# EAGLE board aquam60 (EAGLE 9.6.2), part 1 of 2
DOCO_NUMBER: 4014 003; REV: 03
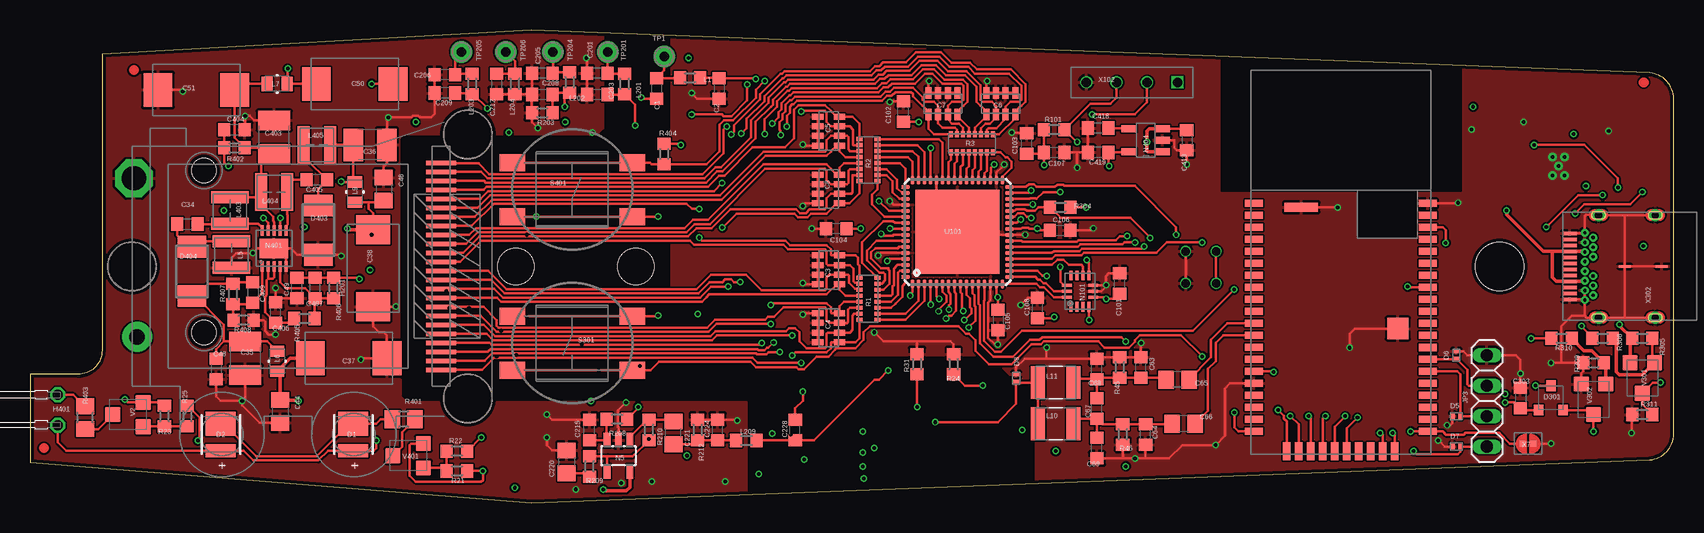
[diagram p0: board, top side]
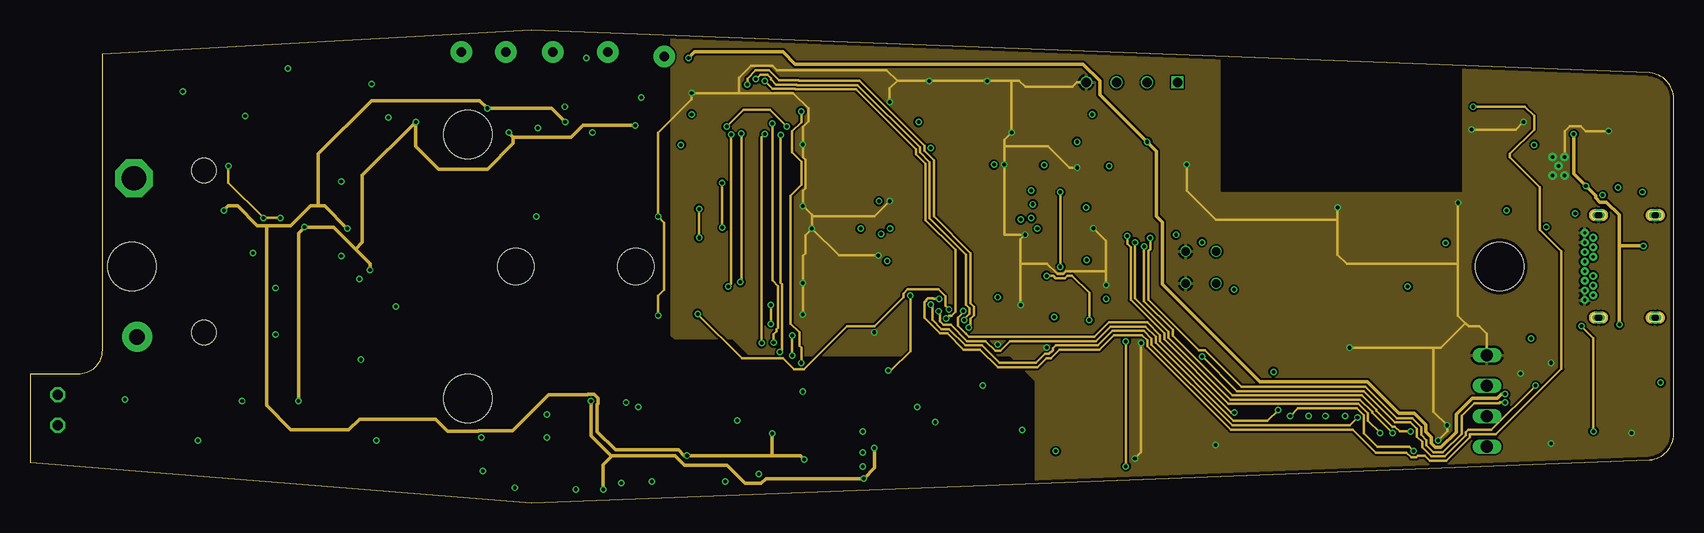
[diagram p1: board, inner layer L2_VCC]
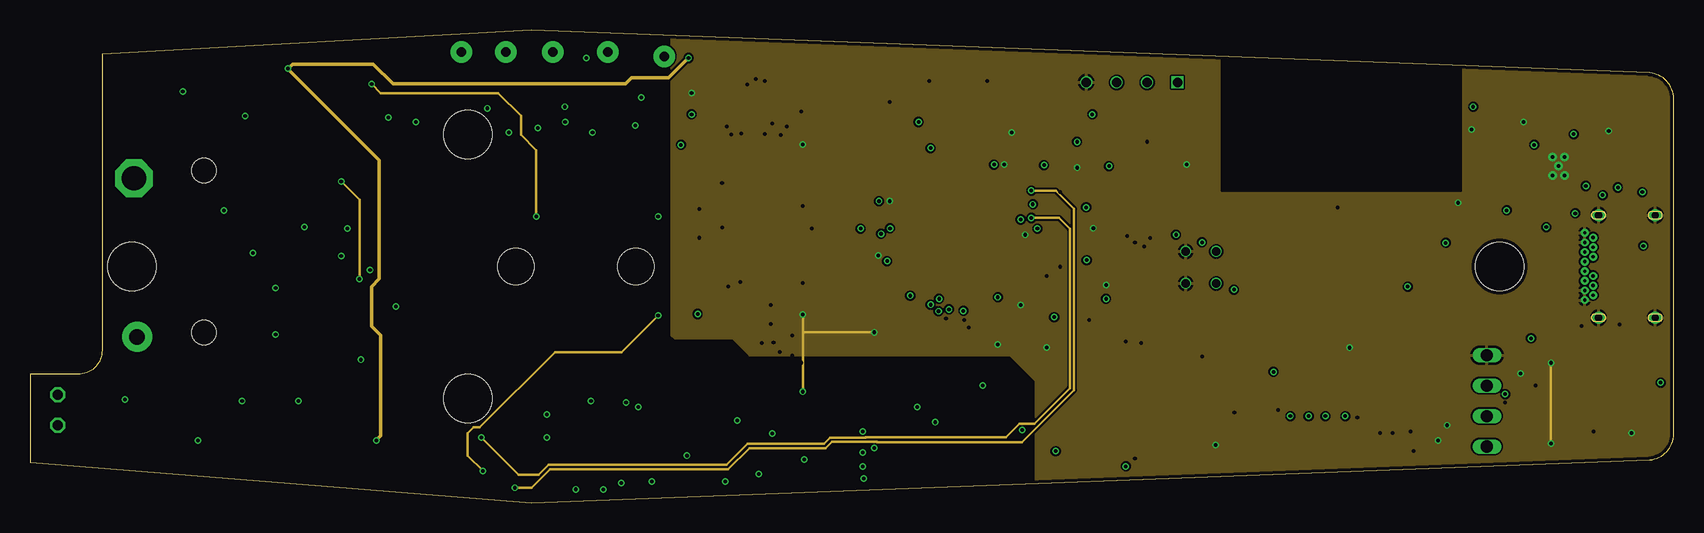
[diagram p2: board, inner layer L3_GND]
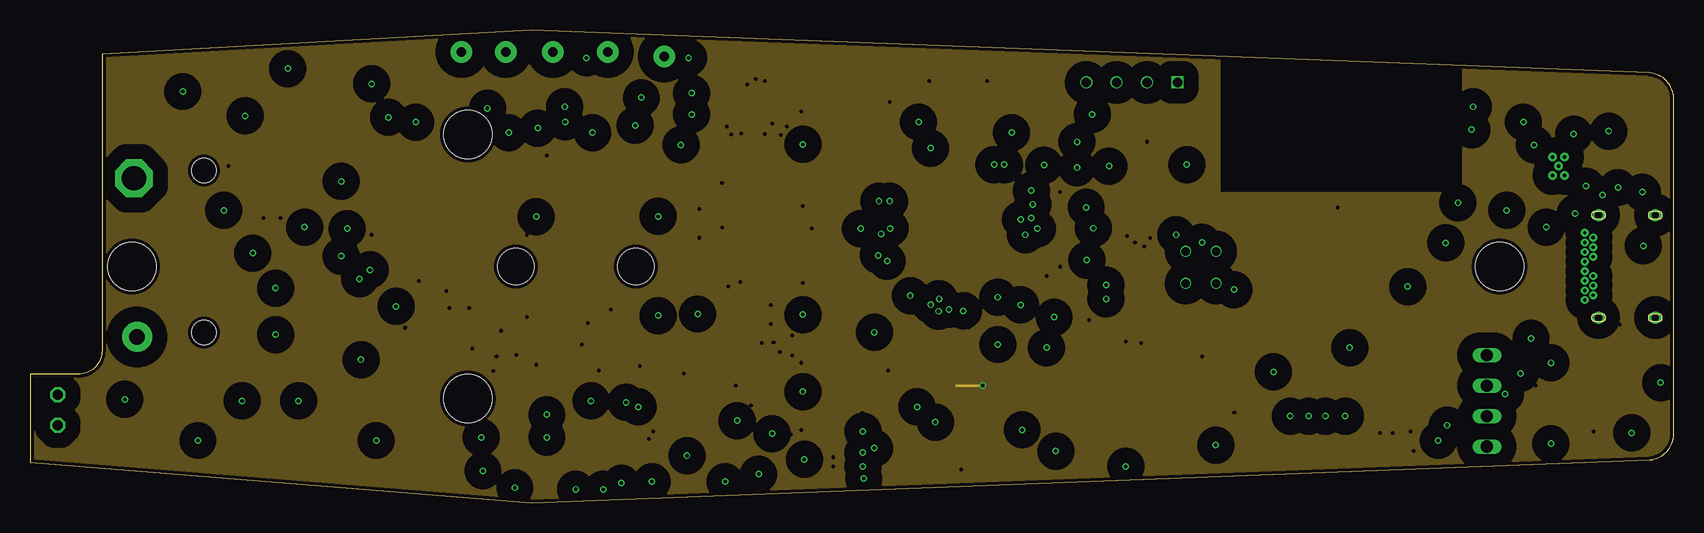
[diagram p3: board, inner layer L4_PE]
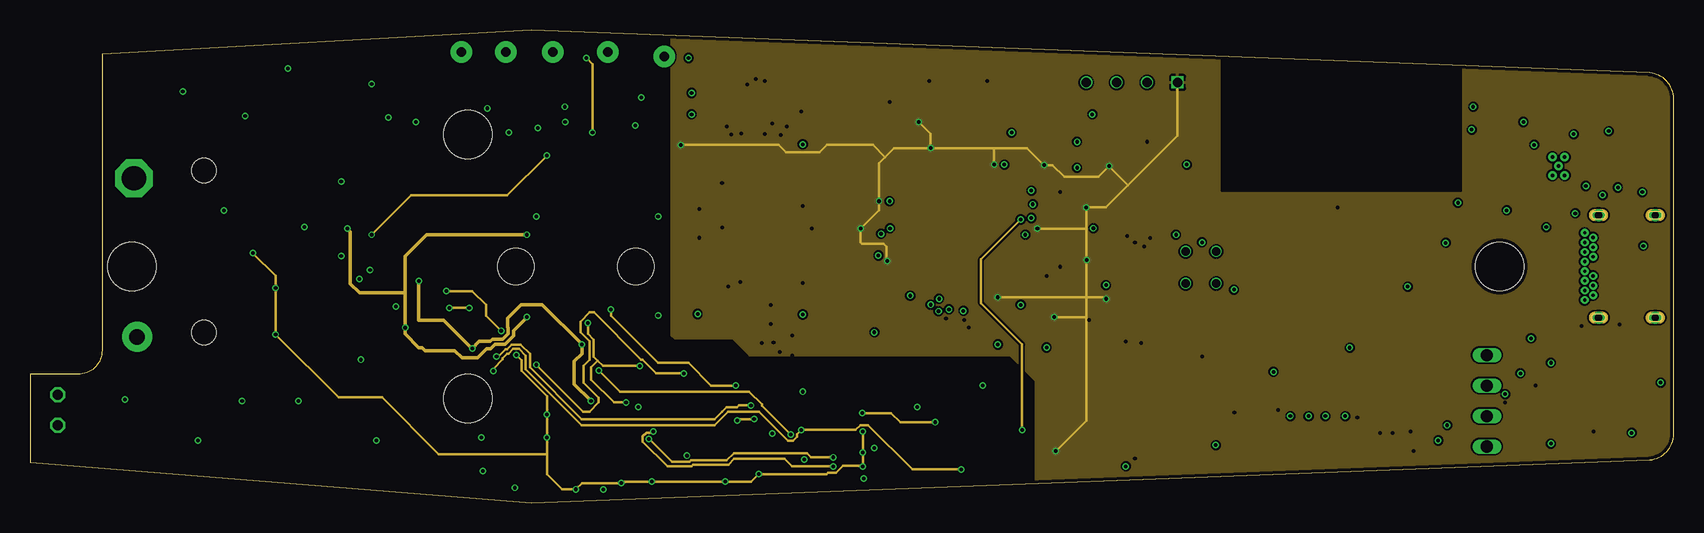
[diagram p4: board, inner layer L5_AGND]
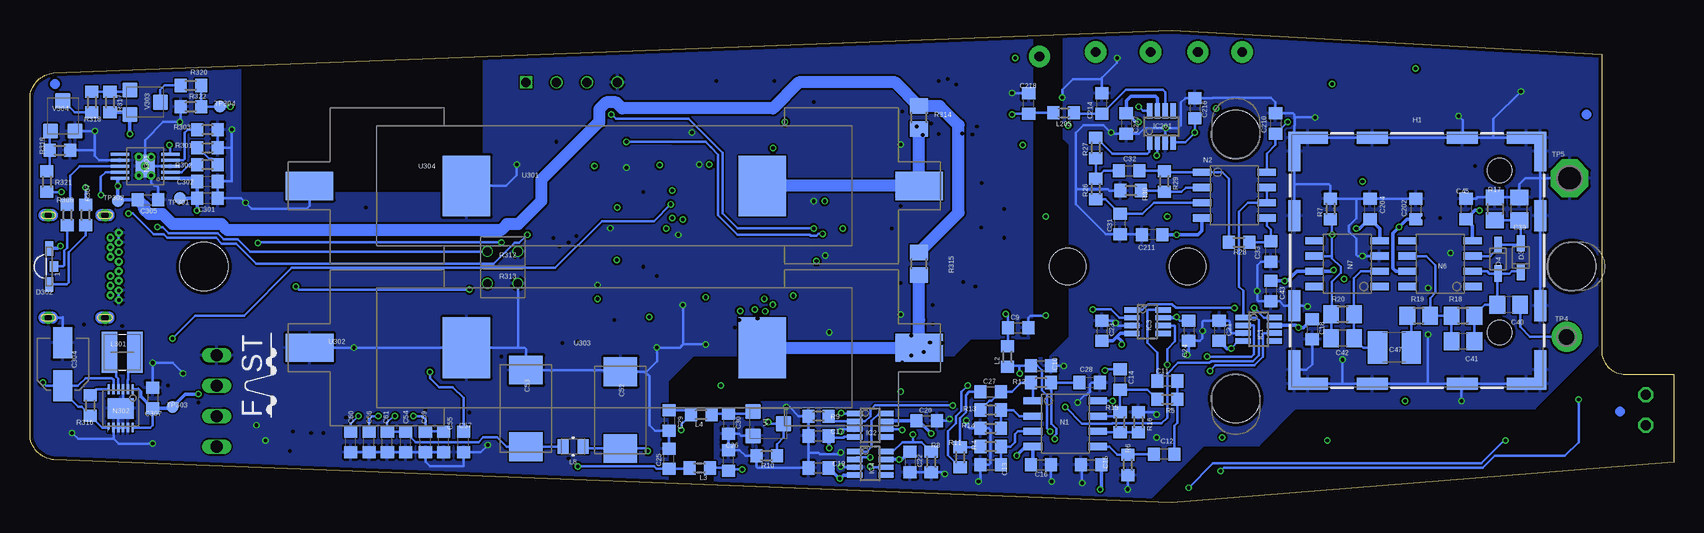
[diagram p5: board, bottom side, seen from below]

Size 137.01 x 39.4 mm. Coordinates in mm from the lower left corner, seen from the top.
Outline: 4.01,10.7 0.01,10.7 0,3.4 41.8,0 135.01,3.58 arc78 137.01,5.52 137.01,33.88 arc78 135.01,35.82 41.8,39.4 6.01,37.38 6.01,12.7 arc-90 4.01,10.7
Copper layers ((1+2)*3+14*(15+16)): Top 0.035mm / dielectric 0.14mm / L2_VCC 0.035mm / dielectric 0.23mm / L3_GND 0.035mm / dielectric 0.14mm / L4_PE 0.035mm / dielectric 0.23mm / L5_AGND 0.035mm / dielectric 0.14mm / Bottom 0.035mm
Design rules "PCB-POOL Standard_ML8_0.20mm_0.10mm_Blind_Via_Blind_VIA": minimum track width 0.15mm, minimum drill 0.2mm, track to track 0.15mm, track to pad 0.15mm, pad to pad 0.15mm, via to via 0.15mm, smd to smd 0.15mm, copper to edge 0.3mm, drill to drill 0.2mm, minimum pad ring 0.1mm, minimum via ring 0.1mm, stop-mask expansion 0.075mm, vias tented up to drill 12mil, thermal gap 0.2mm
Net classes: 1 V+: width 0.305 mm; 3 VCC: width 0.203 mm; 4 AGND: clearance 1.016 mm to class 2, clearance 1.016 mm to class 3; 5 PE: clearance 1.27 mm to class 0, clearance 1.27 mm to class 1, clearance 1.27 mm to class 2, clearance 1.27 mm to class 3, clearance 1.27 mm to class 4, clearance 1.27 mm
Holes 3 mm at 40.5,19.7 50.5,19.7
Holes 4 mm at 122.5,19.7
tKeepout: area 37.5,16.7 to 43.5,22.7; area 47.5,16.7 to 53.5,22.7; area 119.5,16.7 to 125.5,22.7
bKeepout: area 37.5,16.7 to 43.5,22.7; area 47.5,16.7 to 53.5,22.7; area 119.5,16.7 to 125.5,22.7; area 37.5,16.7 to 43.5,22.7; area 47.5,16.7 to 53.5,22.7
tRestrict: area 99.3,26 to 119.3,37.8

## Footprints (pad centres in the part's own frame; a part is rotated, then mirrored left to right if it is on the bottom)
C0603 = smd 1 x 1.1: 1 -0.85,0; 2 0.85,0
C0612 = smd 0.5 x 0.95: 1 -1.2,0.9; 2 -1.2,-0.9; 3 -0.4,0.9; 4 -0.4,-0.9; 5 0.4,0.9; 6 0.4,-0.9; 7 1.2,0.9; 8 1.2,-0.9
C1210 = smd 1.6 x 2.7: 1 -1.4,0; 2 1.4,0
WE_WCAP-PHGP = smd 2.4 x 2.8: 1- -3.2,0; 2+ 3.2,0
C0805 = smd 1.3 x 1.5: 1 -0.95,0; 2 0.95,0
2.6X1.6X1(BXCXA) = smd 2.6 x 1.6: 1 1.8,0; 2 -1.8,0
WL-SWTP_3030 = smd 2 x 2.5: 1 -0.9,0 | smd 1.1 x 2.5: 2 1.35,0
SOD-323 = smd 1.35 x 0.65: A 1.2,0; K -1.2,0
DIODFN100X60X60-2 = smd 0.36 x 0.6: 1 -0.32,0; 2 0.32,0
SOT23 = smd 0.8 x 0.9: 1 -1.016,-1.016; 2 1.016,-1.016; 3 0,1.016
WL-SBSW_1204 = smd 0.9 x 0.7: 1 0,-0.4 | smd 1.2 x 0.7: 2 1.5,0; 3 -1.5,0
DO214AC = smd 1.8 x 2.4: A 2.05,0; C -2.05,0
WE-SHC_SMD-FRAME_36103205 = smd 3.3 x 1: 1 9.1,10.25; 6 9.1,-10.25; 9 -9.1,-10.25; 14 -9.1,10.25 | smd 1 x 3.3: 2 10.25,9.1; 5 10.25,-9.1; 10 -10.25,-9.1; 13 -10.25,9.1 | smd 1 x 2.6: 3 10.25,3.75; 4 10.25,-3.75; 11 -10.25,-3.75; 12 -10.25,3.75 | smd 2.6 x 1: 7 3.75,-10.25; 8 -3.75,-10.25; 15 -3.75,10.25; 16 3.75,10.25
AQUAM60 = smd 0.4 x 2.5: P$1 -8.625,-11.75; P$2 -7.875,-11.75; P$3 -7.125,-11.75; P$4 -6.375,-11.75; P$5 -5.625,-11.75; P$6 -4.875,-11.75; P$7 -4.125,-11.75; P$8 -3.375,-11.75; P$9 -2.625,-11.75; P$10 -1.875,-11.75; P$11 -1.125,-11.75; P$12 -0.375,-11.75; P$13 0.375,-11.75; P$14 1.125,-11.75; P$15 1.875,-11.75; P$16 2.625,-11.75; P$17 3.375,-11.75; P$18 4.125,-11.75; P$19 4.875,-11.75; P$20 5.625,-11.75; P$21 6.375,-11.75; P$22 7.125,-11.75; P$23 7.875,-11.75; P$24 8.625,-11.75 | hole 4: 0,14; -11,-14; 11,-14 | hole 2: -5.5,8; 8,8
LED3MM_H7,5MM = drill 0.813 pad 1.27 octagon: A 0,-1.27; K 0,1.27
SOT-23-8 = smd 0.45 x 1.27: 1 -0.975,-1.3; 2 -0.325,-1.3; 3 0.325,-1.3; 4 0.975,-1.3; 5 0.975,1.3; 6 0.325,1.3; 7 -0.325,1.3; 8 -0.975,1.3
1X04 = drill 1.016 long: 1 -3.81,0; 2 -1.27,0; 3 1.27,0; 4 3.81,0
R0603 = smd 1 x 1.1: 1 -0.85,0; 2 0.85,0
WE-TPC_2811/2813 = smd 1 x 3.1: 1 -1.1,0; 2 1.1,0
WE-KI_0805 = smd 0.925 x 1.2: 1 -0.838,0; 2 0.838,0
INDC3225X250N = smd 1.17 x 2.72: 1 -1.474,0; 2 1.474,0
WE-MAPI_3015/3020 = smd 1.3 x 3.4: 1 -1.05,0; 2 1.05,0
BM83 = smd 1.5 x 0.6: 1 -7.25,4.9; 2 -7.25,3.9; 3 -7.25,2.9; 4 -7.25,1.9; 5 -7.25,0.9; 6 -7.25,-0.1; 7 -7.25,-1.1; 8 -7.25,-2.1; 9 -7.25,-3.1; 10 -7.25,-4.1; 11 -7.25,-5.1; 12 -7.25,-6.1; 13 -7.25,-7.1; 14 -7.25,-8.1; 15 -7.25,-9.1; 16 -7.25,-10.1; 17 -7.25,-11.1; 18 -7.25,-12.1; 19 -7.25,-13.1; 20 -7.25,-14.1; 31 7.25,-14.1; 32 7.25,-13.1; 33 7.25,-12.1; 34 7.25,-11.1; 35 7.25,-10.1; 36 7.25,-9.1; 37 7.25,-8.1; 38 7.25,-7.116; 39 7.25,-6.084; 40 7.25,-5.1; 41 7.25,-4.1; 42 7.25,-3.1; 43 7.25,-2.1; 44 7.25,-1.1; 45 7.25,-0.1; 46 7.25,0.9; 47 7.25,1.9; 48 7.25,2.9; 49 7.25,3.9; 50 7.25,4.9 | smd 0.6 x 1.5: 21 -4.5,-15.75; 22 -3.5,-15.75; 23 -2.5,-15.75; 24 -1.5,-15.75; 25 -0.5,-15.75; 26 0.5,-15.75; 27 1.5,-15.75; 28 2.5,-15.75; 29 3.5,-15.75; 30 4.5,-15.75 | smd 1.78 x 1.78: 56 4.77,-5.53 | smd 2.79 x 0.76: 57 -3.29,4.58
SO-8 = smd 1.55 x 0.6: 1 -2.7,1.905; 2 -2.7,0.635; 3 -2.7,-0.635; 4 -2.7,-1.905; 5 2.7,-1.905; 6 2.7,-0.635; 7 2.7,0.635; 8 2.7,1.905
SOT-23L = smd 0.55 x 1.2: 1 -0.95,-1.3; 2 0,-1.3; 3 0.95,-1.3; 4 0.95,1.3; 5 -0.95,1.3
LGA-14 = smd 0.8 x 0.25: 1 -1.3,0.75; 2 -1.3,0.25; 3 -1.3,-0.25; 4 -1.3,-0.75; 8 1.3,-0.75; 9 1.3,-0.25; 10 1.3,0.25; 11 1.3,0.75 | smd 0.25 x 0.8: 5 -0.5,-1.1; 6 0,-1.1; 7 0.5,-1.1; 12 0.5,1.1; 13 0,1.1; 14 -0.5,1.1
HVSSOP10 = smd 0.25 x 1.55: 1 -1,-2.1; 2 -0.5,-2.1; 3 0,-2.1; 4 0.5,-2.1; 5 1,-2.1; 6 1,2.1; 7 0.5,2.1; 8 0,2.1; 9 -0.5,2.1; 10 -1,2.1 | smd 1.88 x 1.57: 11 0,0 | drill 0.3 pad 0.7: P$1 0,0; P$2 0.762,0.508; P$3 0.762,-0.508; P$4 -0.762,-0.508; P$5 -0.762,0.508
DFN_12POL_+0,2MM = smd 0.2 x 0.8: 1 -1,-1.6; 2 -0.6,-1.6; 3 -0.2,-1.6; 4 0.2,-1.6; 5 0.6,-1.6; 6 1,-1.6; 7 1,1.6; 8 0.6,1.6; 9 0.2,1.6; 10 -0.2,1.6; 11 -0.6,1.6; 12 -1,1.6 | smd 2.2 x 1.68: 13 0,0
DFN_10POL_3X3MM+0,2MM = smd 0.25 x 0.875: 1 -1,-1.513; 2 -0.5,-1.513; 3 0,-1.513; 4 0.5,-1.513; 5 1,-1.513; 6 1,1.513; 7 0.5,1.513; 8 0,1.513; 9 -0.5,1.513; 10 -1,1.513 | smd 2.38 x 1.65: 11 0,0
SOT-23-5 = smd 0.6 x 1.27: 1 -0.95,-1.4; 2 0,-1.4; 3 0.95,-1.4; 4 0.95,1.4; 5 -0.95,1.4
R1506 = smd 0.35 x 0.5: 1 -1.75,0.75; 2 -1.75,-0.75; 3 -1.25,0.75; 4 -1.25,-0.75; 5 -0.75,0.75; 6 -0.75,-0.75; 7 -0.25,0.75; 8 -0.25,-0.75; 9 0.25,0.75; 10 0.25,-0.75; 11 0.75,0.75; 12 0.75,-0.75; 13 1.25,0.75; 14 1.25,-0.75; 15 1.75,0.75; 16 1.75,-0.75
R0805 = smd 1.3 x 1.5: 1 -0.95,0; 2 0.95,0
AT-2 = drill 0.7: P$1 -1.27,0; P$2 1.27,0
1301.93XX = smd 2.1 x 1.4: P1 -5,-2.25; P2 5,-2.25; P3 5,2.25; P4 -5,2.25
P1-08 = drill 0.8 pad 1.778: TP 0,0
P1-13R = drill 1.3 pad 2.5: TP 0,0
P1-20 = drill 2.007 pad 3.15 octagon: TP 0,0
TP10R = smd 1 x 1: TP 0,0
MLF-(VQFN)-64M2-64 = smd 0.7 x 0.3: 1 -4.325,3.75; 2 -4.325,3.25; 3 -4.325,2.75; 4 -4.325,2.25; 5 -4.325,1.75; 6 -4.325,1.25; 7 -4.325,0.75; 8 -4.325,0.25; 9 -4.325,-0.25; 10 -4.325,-0.75; 11 -4.325,-1.25; 12 -4.325,-1.75; 13 -4.325,-2.25; 14 -4.325,-2.75; 15 -4.325,-3.25; 16 -4.325,-3.75; 33 4.325,-3.75; 34 4.325,-3.25; 35 4.325,-2.75; 36 4.325,-2.25; 37 4.325,-1.75; 38 4.325,-1.25; 39 4.325,-0.75; 40 4.325,-0.25; 41 4.325,0.25; 42 4.325,0.75; 43 4.325,1.25; 44 4.325,1.75; 45 4.325,2.25; 46 4.325,2.75; 47 4.325,3.25; 48 4.325,3.75 | smd 0.3 x 0.7: 17 -3.75,-4.325; 18 -3.25,-4.325; 19 -2.75,-4.325; 20 -2.25,-4.325; 21 -1.75,-4.325; 22 -1.25,-4.325; 23 -0.75,-4.325; 24 -0.25,-4.325; 25 0.25,-4.325; 26 0.75,-4.325; 27 1.25,-4.325; 28 1.75,-4.325; 29 2.25,-4.325; 30 2.75,-4.325; 31 3.25,-4.325; 32 3.75,-4.325; 49 3.75,4.325; 50 3.25,4.325; 51 2.75,4.325; 52 2.25,4.325; 53 1.75,4.325; 54 1.25,4.325; 55 0.75,4.325; 56 0.25,4.325; 57 -0.25,4.325; 58 -0.75,4.325; 59 -1.25,4.325; 60 -1.75,4.325; 61 -2.25,4.325; 62 -2.75,4.325; 63 -3.25,4.325; 64 -3.75,4.325 | smd 7 x 7: TH 0,0
55+ = smd 3.962 x 5.08: P$1 8.636,0 | smd 3.962 x 2.337: P$2 21.717,0
55- = smd 3.962 x 2.337: P$1 -21.717,0 | smd 3.962 x 5.08: P$2 -8.636,0
SMDTR-1 = smd 1.27 x 1.27: 1 -1.016,-1.27; 2 1.016,-1.27; 3 0,1.27
LöTBRüCKE_2 = smd 0.5 x 0.5: 1 -0.457,0; 2 0.432,0
AVRPDI4 = drill 0.8 square: 1 -3.81,0 | drill 0.8: 2 -1.27,0; 3 1.27,0; 4 3.81,0
632723300011_4L = smd 0.3 x 1.2: A1 -2.75,2.4; A2 -2.25,2.4; A3 -1.75,2.4; A4 -1.25,2.4; A5 -0.75,2.4; A6 -0.25,2.4; A7 0.25,2.4; A8 0.75,2.4; A9 1.25,2.4; A10 1.75,2.4; A11 2.25,2.4; A12 2.75,2.4 | drill 0.273 pad 0.65: B1 2.8,1.15; B2 2.4,0.45; B3 1.6,0.45; B4 1.2,1.15; B5 0.8,0.45; B6 0.4,1.15; B7 -0.4,1.15; B8 -0.8,0.45; B9 -1.2,1.15; B10 -1.6,0.45; B11 -2.4,0.45; B12 -2.8,1.15; G3 2,1.15; G4 -2,1.15 | drill 0.6 pad 1: Z1 -4.27,0; Z2 4.27,0; Z3 -4.27,-4.73; Z4 4.27,-4.73 | smd 0.2 x 1: Z5 0,-2.18; Z6 0,-5.28

## Placement (x,y rotation side)
C1  1n  [C0603]  52.23,34.53 270 top
C2  1n  [C0603]  57.44,34.53 270 top
C3  4x10nF  [C0612]  66.58,19.42 270 top
C4  4x10nF  [C0612]  66.58,14.59 270 top
C5  4x10nF  [C0612]  66.58,30.97 270 top
C6  4x10nF  [C0612]  80.93,33.26 0 top
C7  4x10nF  [C0612]  76.1,33.26 0 top
C8  4x10nF  [C0612]  66.58,26.15 90 top
C9  1n  [C0603]  54.64,14.59 0 bottom
C10  1n  [C0603]  52.74,11.41 0 bottom
C11  27n  [C0603]  42.2,10.14 180 bottom
C12  27n  [C0603]  42.45,4.05 180 bottom
C13  1n5  [C0603]  56.93,3.16 0 bottom
C14  27n  [C0603]  46.13,10.27 90 bottom
C15  100n  [C0603]  48.55,3.16 0 bottom
C16  100n  [C0603]  52.74,3.16 0 bottom
C17  100n  [C0603]  71.28,5.57 0 bottom
C18  100n  [C0603]  30.13,14.46 270 bottom
C19  100n  [C0603]  71.28,2.91 0 bottom
C20  100n  [C0603]  62.26,6.84 0 bottom
C21  100n  [C0603]  37.88,14.34 270 bottom
C22  100n  [C0603]  63.66,3.41 270 bottom
C23  100n  [C0603]  47.66,14.34 270 bottom
C24  100n  [C0603]  40.42,14.34 270 bottom
C25  1n  [C0603]  83.72,3.67 90 bottom
C26  1n  [C0603]  78.77,3.54 90 bottom
C27  150n  [C0603]  56.93,9.26 0 bottom
C28  150n  [C0603]  48.67,10.02 180 bottom
C29  1n  [C0603]  83.72,6.84 270 bottom
C30  1n  [C0603]  78.77,6.59 270 bottom
C31  16p  [C0603]  46.13,23.23 90 bottom
C32  1n6  [C0603]  45.37,27.67 0 bottom
C33  1n6  [C0603]  33.56,20.94 90 bottom
C34  2u2  [C0603]  13.11,23.23 0 top
C35  10u  [C1210]  17.94,12.05 270 top
C36  10u  [C1210]  28.35,29.83 180 top
C37  875015119003  [WE_WCAP-PHGP]  26.57,12.05 180 top
C38  875015119003  [WE_WCAP-PHGP]  28.61,19.54 270 top
C39  100n  [C0805]  12.86,24.5 90 bottom
C40  100n  [C0805]  13.75,16.5 180 bottom
C41  470p  [C0805]  17.56,13.45 180 bottom
C42  100p  [C0805]  27.59,13.7 180 bottom
C43  100n  [C0603]  33.56,17.64 270 bottom
C44  4u7  [C0805]  20.86,7.61 270 top
C45  100n  [C0603]  17.3,24.5 270 bottom
C46  4u7  [C0805]  29.5,26.15 270 top
C47  22u / 25V  [C1210]  23.27,12.94 180 bottom
C48  10n  [C0603]  15.53,11.16 270 top
C49  10n  [C0603]  22.26,17.89 90 top
C50  875015119003  [WE_WCAP-PHGP]  27.08,34.91 180 top
C51  875015119003  [WE_WCAP-PHGP]  13.87,34.4 0 top
C52  875015119003  [WE_WCAP-PHGP]  87.79,7.73 270 bottom
C53  875015119003  [WE_WCAP-PHGP]  95.66,7.86 270 bottom
C54  100n  [C0603]  105.69,5.07 90 bottom
C55  100n  [C0603]  102.52,5.07 90 bottom
C56  100n  [C0603]  108.74,5.07 90 bottom
C57  1u  [C0603]  100.87,5.07 90 bottom
C59  1u  [C0603]  104.04,5.07 90 bottom
C60  100n  [C0603]  110.27,5.07 90 bottom
C61  1u  [C0603]  107.22,5.07 90 bottom
C63  470p  [C0603]  92.61,11.29 90 top
C64  470p  [C0603]  93,5.7 90 top
C65  10u  [C0805]  95.66,10.27 180 top
C66  10u  [C0805]  96.17,6.59 180 top
C67  220n  [C0603]  88.93,7.86 90 top
C68  100n  [C0603]  88.93,11.16 90 top
C69  100n  [C0603]  88.93,4.56 90 top
C101  100n  [C0603]  90.84,18.27 90 top
C102  4u7  [C0603]  72.8,32.62 90 top
C103  100n  [C0603]  83.09,29.96 90 top
C104  100n  [C0603]  67.21,22.84 180 top
C105  100n  [C0603]  80.68,15.23 270 top
C106  100n  [C0603]  85.88,22.72 0 top
C107  100n  [C0603]  85.38,29.2 0 top
C108  100n  [C0603]  83.98,16.24 90 top
C201  1n  [C0603]  47.27,35.8 180 top
C202  100n  [C0603]  21.49,24.5 270 bottom
C203  1n  [C0603]  47.27,34.02 180 top
C204  100n  [C0603]  25.3,24.5 90 bottom
C205  1n  [C0603]  42.7,35.8 180 top
C206  1n  [C0603]  34.58,35.67 180 top
C208  1n  [C0603]  42.7,34.02 180 top
C209  1n  [C0603]  34.58,34.15 180 top
C210  100n  [C0603]  33.18,31.61 270 bottom
C211  100n  [C0603]  43.47,22.34 180 bottom
C212  1n  [C0603]  38.89,34.91 270 top
C214  1n  [C0603]  47.66,33.26 90 bottom
C215  1n  [C0603]  46.64,6.08 90 top
C216  100n  [C0603]  39.91,32.88 270 bottom
C217  100n  [C0603]  45.62,31.61 270 bottom
C218  1n  [C0603]  53.75,33.26 90 bottom
C220  4u7  [C0805]  44.73,3.41 270 top
C221  100n  [C0805]  53.62,5.83 90 top
C224  1n  [C0603]  57.31,6.08 90 top
C228  1n  [C0603]  63.78,6.08 90 top
C301  2u2  [C0603]  122.2,25.38 0 bottom
C302  2u2  [C0603]  122.2,26.78 0 bottom
C303  100n  [C0603]  124.24,8.75 270 top
C304  865080140004  [2.6X1.6X1(BXCXA)]  134.27,11.54 270 bottom
C305  2u2  [C0603]  127.16,25.26 0 bottom
C307  100n  [C0603]  126.78,8.75 270 bottom
C403  47u/16V  [C1210]  20.35,30.46 90 top
C404  100n  [C0603]  17.05,31.1 0 top
C405  2u2  [C0603]  23.91,26.91 180 top
C406  1uF  [C0603]  20.48,15.86 90 top
C407  100p  [C0603]  23.78,17.89 90 top
C409  100p  [C0603]  18.57,17.51 270 top
C413  1u  [C0603]  96.42,30.21 270 top
C418  10n  [C0603]  89.06,31.23 180 top
C419  2u2  [C0603]  89.06,29.2 180 top
D1  158303240A  [WL-SWTP_3030]  26.95,5.7 270 top
D2  158303240A  [WL-SWTP_3030]  15.91,5.7 270 top
D3  1N4448WS-7-F  [SOD-323]  12.73,20.43 90 bottom
D4  1N4448WS-7-F  [SOD-323]  14.64,20.3 270 bottom
D5  PESD5V0X1BL,315  [DIODFN100X60X60-2]  118.9,7.22 180 top
D6  PESD5V0X1BL,315  [DIODFN100X60X60-2]  118.9,12.3 90 top
D7  PESD5V0X1BL,315  [DIODFN100X60X60-2]  118.9,4.68 180 top
D8  PESD5V0X1BL,315  [DIODFN100X60X60-2]  82.2,10.4 90 top
D301  BAT54C  [SOT23]  126.78,8.75 0 top
D302  155124RG73200  [WL-SBSW_1204]  135.4,19.7 90 bottom
D403  B240A  [DO214AC]  24.03,22.72 90 top
D404  B240A  [DO214AC]  13.49,19.29 90 top
H1  36103205  [WE-SHC_SMD-FRAME_36103205]  21.37,20.18 0 bottom
H201  [AQUAM60]  22.5,19.7 90 top
H401  LL-304WC2E-W2-3TC  [LED3MM_H7,5MM]  2.32,7.73 0 top
IC1  TS12A12511DCNR  [SOT-23-8]  34.58,14.46 270 bottom
IC2  TS12A12511DCNR  [SOT-23-8]  66.96,6.46 270 bottom
IC3  TS12A12511DCNR  [SOT-23-8]  43.85,15.1 270 bottom
IC4  TS12A12511DCNR  [SOT-23-8]  66.96,3.29 270 bottom
IC201  TS12A12511DCNR  [SOT-23-8]  42.7,31.35 0 bottom
JP3  n.b.  [1X04]  121.44,8.49 90 top
L1  742863160  [R0603]  55.02,35.42 0 top
L2  742863160  [R0603]  55.53,12.18 90 bottom
L3  742863160  [R0603]  81.18,2.91 180 bottom
L4  742863160  [R0603]  81.06,7.35 180 bottom
L5  744025100  [WE-TPC_2811/2813]  16.8,20.69 90 top
L6  100nH  [WE-KI_0805]  20.61,11.8 270 top
L7  100nH  [WE-KI_0805]  20.61,34.91 180 top
L8  100nH  [WE-KI_0805]  91.72,4.68 180 bottom
L9  100nH  [WE-KI_0805]  27.08,25.89 270 top
L10  LQW32FT220M0HL  [INDC3225X250N]  85.5,6.59 0 top
L11  LQW32FT220M0HL  [INDC3225X250N]  85.5,10.02 0 top
L201  742792602  [R0603]  49.56,34.91 270 top
L202  742863160  [R0603]  44.99,35.04 270 top
L203  742792602  [R0603]  36.86,34.91 270 top
L204  742792602  [R0603]  40.42,34.91 270 top
L205  742863160  [R0603]  50.83,32.5 180 bottom
L209  742863160  [R0603]  59.72,5.19 0 top
L301  74438336022  [WE-MAPI_3015/3020]  129.32,12.56 0 bottom
L403  744025100  [WE-TPC_2811/2813]  16.67,24.37 270 top
L404  744025100  [WE-TPC_2811/2813]  20.35,25.89 0 top
L405  744025100  [WE-TPC_2811/2813]  23.91,29.83 0 top
M1  BM83SM1  [BM83]  109.25,20.05 0 top
N1  TL082IDR  [SO-8]  50.7,6.59 0 bottom
N2  TL082IDR  [SO-8]  36.61,25.64 0 bottom
N5  TLV170IDBV  [SOT-23L]  49.05,3.92 180 top
N6  LF356M  [SO-8]  19.46,19.92 180 bottom
N7  OP27GS  [SO-8]  27.21,19.92 180 bottom
N101  LSM6DSL  [LGA-14]  87.53,17.64 90 top
N301  BQ24092  [HVSSOP10]  127.41,28.05 90 bottom
N302  LM3668SD-4550/NOPB  [DFN_12POL_+0,2MM]  129.44,7.86 180 bottom
N401  LT3471EDD  [DFN_10POL_3X3MM+0,2MM]  20.35,21.19 0 top
N404  TPS79933DDCR  [SOT-23-5]  93,30.21 90 top
R1  8x10K  [R1506]  69.88,17 90 top
R2  8x10K  [R1506]  69.88,28.56 90 top
R3  8x10K  [R1506]  78.52,29.96 0 top
R4  330k  [R0603]  56.93,4.68 180 bottom
R5  6k8  [R0603]  42.2,8.62 180 bottom
R6  22k  [R0603]  45.5,3.16 90 bottom
R7  10k  [R0603]  28.61,24.5 90 bottom
R8  12k  [R0603]  61.88,3.41 270 bottom
R9  100k  [R0603]  71.28,7.22 180 bottom
R10  100k  [R0603]  75.6,3.92 180 bottom
R11  3k3  [R0603]  59.47,3.79 270 bottom
R12  3k3  [R0603]  52.74,10.02 180 bottom
R13  0  [R0603]  56.93,7.73 0 bottom
R14  n.b.  [R0603]  56.93,6.21 0 bottom
R15  0  [R0603]  46.13,6.72 270 bottom
R16  n.b.  [R0603]  44.61,6.72 270 bottom
R17  100k  [R0805]  14.89,24.5 270 bottom
R18  10M  [R0805]  17.56,15.61 0 bottom
R19  1k  [R0805]  21.24,15.61 0 bottom
R20  150k  [R0805]  27.59,15.73 0 bottom
R21  10k  [R0603]  35.59,2.65 180 top
R22  1k  [R0603]  35.59,4.3 0 top
R23  10k  [R0603]  11.21,7.22 270 top
R24  0  [R0603]  76.99,11.54 90 top
R25  1k  [R0603]  13.11,7.22 270 top
R26  3M3  [R0603]  48.16,26.15 90 bottom
R27  3k3  [R0603]  48.16,29.58 90 bottom
R28  33k  [R0603]  36.23,21.7 180 bottom
R29  0  [R0603]  42.45,26.78 270 bottom
R30  n.b.  [R0603]  45.24,26.02 0 bottom
R31  0  [R0603]  73.94,11.54 90 top
R45  10k  [R0603]  90.84,11.29 270 top
R46  10k  [R0603]  91.09,5.7 270 top
R101  10k  [R0603]  85.38,31.1 180 top
R203  10k  [R0603]  42.7,32.5 180 top
R208  1k  [R0603]  48.93,6.97 0 top
R209  4k7  [R0603]  46.64,3.03 90 top
R210  100k  [R0603]  51.59,6.08 270 top
R212  68k  [R0603]  55.66,6.08 270 top
R301  1k  [R0603]  122.2,29.58 180 bottom
R302  1k  [R0603]  122.2,28.18 180 bottom
R303  3k9  [R0603]  122.2,31.1 180 bottom
R304  1k  [R0603]  85.88,24.62 0 top
R305  22k  [R0603]  134.4,13.7 180 top
R306  1k  [R0603]  131.09,13.7 0 top
R307  5k6  [R0603]  132.37,23.99 90 bottom
R308  1k  [R0603]  133.89,23.99 90 bottom
R309  22k  [R0603]  130.33,11.67 0 top
R310  1k  [R0603]  127.67,13.7 0 top
R311  180k  [R0603]  134.4,7.35 0 top
R312  203AT-2  [AT-2]  97.6,20.95 180 bottom
R313  203AT-2  [AT-2]  97.6,18.29 180 bottom
R314  0ZCK0100FF2E  [R0805]  62.9,32.12 90 bottom
R315  0ZCK0100FF2E  [R0805]  62.9,19.92 90 bottom
R316  10M  [R0603]  131.98,8.11 90 bottom
R317  22k  [R0603]  130.33,33.39 270 bottom
R318  1k  [R0603]  131.86,33.39 90 bottom
R319  22k  [R0603]  134.52,29.37 180 bottom
R320  10k  [R0603]  123.6,34.78 180 bottom
R321  1k  [R0603]  135.6,26.77 90 bottom
R322  2k7  [R0603]  123.6,33.01 0 bottom
R401  470R  [R0805]  31.15,6.97 180 top
R402  10k  [R0603]  17.05,29.58 0 top
R403  47R  [R0805]  4.6,7.1 90 top
R404  22k  [R0603]  52.86,29.07 90 top
R405  10k  [R0603]  22.89,15.35 180 top
R406  51k  [R0603]  25.3,17.89 270 top
R407  160k  [R0603]  16.92,17.38 90 top
R408  39k  [R0603]  17.81,15.23 180 top
S301  1301.9320  [1301.93XX]  45.2,13.3 180 top
S401  1301.9320  [1301.93XX]  45.2,26.1 0 top
TP1  n.b.  [P1-08]  52.86,37.2 0 top
TP4  n.b.  [P1-13R]  8.92,13.83 0 bottom
TP5  n.b.  [P1-20]  8.67,27.04 0 bottom
TP201  n.b.  [P1-08]  48.16,37.58 270 top
TP204  n.b.  [P1-08]  43.59,37.58 270 top
TP205  n.b.  [P1-08]  35.97,37.58 270 top
TP206  n.b.  [P1-08]  39.66,37.58 270 top
TP301  n.b.  [TP10R]  124.49,25.38 270 bottom
TP302  n.b.  [TP10R]  129.69,25.14 0 bottom
TP303  n.b.  [TP10R]  125.13,7.99 270 bottom
TP304  n.b.  [TP10R]  121.19,33.01 90 bottom
U101  ATXMEGA64A3-MH  [MLF-(VQFN)-64M2-64]  77.32,22.57 90 top
U301  55  [55+]  84.61,26.4 0 bottom
U302  55  [55-]  91.98,12.92 0 bottom
U303  55  [55+]  84.61,12.92 0 bottom
U304  55  [55-]  91.98,26.4 0 bottom
U$1  [LOGO_KLEIN]  117.89,9.64 90 bottom
U$2  [PASSER-CIRCLE-0.8MM]  1.17,4.56 0 top
U$3  [PASSER-CIRCLE-0.8MM]  8.67,36.05 0 top
U$5  [PASSER-CIRCLE-0.8MM]  134.52,35.04 0 top
U$6  [PASSER-CIRCLE-0.8MM]  4.48,7.61 0 bottom
U$7  [PASSER-CIRCLE-0.8MM]  7.27,32.37 0 bottom
U$8  [PASSER-CIRCLE-0.8MM]  134.92,34.9 0 bottom
V1  FDV301N  [SMDTR-1]  75.47,6.59 270 bottom
V2  FDV301N  [SMDTR-1]  8.16,7.35 90 top
V301  NTR2101PT1G  [SMDTR-1]  134.4,10.4 180 top
V302  FDV301N  [SMDTR-1]  130.33,8.62 180 top
V303  NTR2101PT1G  [SMDTR-1]  127.41,33.39 270 bottom
V304  FDV301N  [SMDTR-1]  134.27,32.24 0 bottom
V401  FDV301N  [SMDTR-1]  31.53,3.92 90 top
X7  n.b.  [LöTBRüCKE_2]  124.87,4.94 180 top
X102  n.b.  [AVRPDI4]  91.85,35.04 180 top
X302  632 723 300 011  [632723300011_4L]  130.75,19.7 90 top

## Library data of the parts
C1 C2 C9-C36 C39-C49 C54-C57 C59-C61 C63-C69 C101-C108 C201-C206 C208-C212 C214-C218 C220 C221 C224 C228 C301-C303 C305 C307 C403-C407 C409 C413 C418 C419 L1-L4 L201-L205 L209 R4-R31 R45 R46 R101 R203 R208-R210 R212 R301-R311 R314-R322 R401-R408 = resistor
C3-C8 = resistor; HERSTELLER: CA064X103K1RACAUTO
C37 C38 C50-C53 = FAST_Kondensatoren
C304 = EAGLE-CAPACITORS-rev16a
D1 D2 = 158303260A_Eagle_WL-SWTP_rev20b; ABSTRAHLWINKEL: 120°; CCT-TYP: 4000K; CHIP-TECHNOLOGY: AlInGaN; CRI-TYP: 85; DATASHEET-URL: https://www.we-online.com/catalog/datasheet/158303240A.pdf; EMITTING-COLOR: Moonlight; PART-NUMBER: 158303240A; PHI-V-TYP: 36lm; V-F-TYP: 2.8V
D3 D4 = FAST_Dioden; HERSTELLER: DIODES; SPANNUNG: 100V; STROM: 500mA; TEMP: -65...150°C
D5-D8 D403 D404 = FAST_Dioden
D301 X102 = fast1
D302 = Eagle_COLOR_LED (rev17c)
H1 = Eagle_WE-SHC (rev21a); DATASHEET-URL: https://www.we-online.com/catalog/datasheet/36103205.pdf; HEIGHT: 3mm; LENGTH: 20mm; MOUNT: SMT; PART-NUMBER: 36103205; WIDTH: 20mm
H201 = FAST_Display
H401 = led; HERSTELLER: LUCKY LIGHT
IC1-IC4 IC201 = FAST_IC; HERSTELLER: TI
JP3 = pinhead
L5 L403-L405 = EagleLibrary_Wuerth_Elektronik_eiSos_V6_20140807; HERSTELLER: Würth
L6-L9 = Eagle_WE-KI (rev21a); DATASHEET-URL: https://www.we-online.com/catalog/datasheet/744760210A.pdf; FRES: 1200MHz; IR: 500mA; MOUNT: SMT; PART-NUMBER: 744760210A; Q-FACTOR: 60; RDC: 0.43Ohm
L10 L11 = USER; AVAILABILITY: In Stock; DESCRIPTION: Inductor with Inductance: 22uH Tol. +/-20%, Package: 1210 (3225); MF: Murata; MP: LQW32FT220M0HL; PACKAGE: 3225 Murata; PRICE: None; PURCHASE-URL: https://pricing.snapeda.com/search/part/LQW32FT220M0HL/?ref=eda
L301 = EAGLE-POWER_MAGNETICS-rev17a
M1 = FAST_Module; HERSTELLER: Microchip
N1 = FAST_OPV; DRIFT: +/-50nV/°C; GAIN: 1,3MHz; SPANNUNG: 5,5V; STROM: 300µA; TEMP: -40..125°C
N2 N5-N7 = FAST_OPV
N101 = FAST_IC; HERSTELLER: ST
N301 = FAST_BAT_CHG; HERSTELLER: TI
N302 = FAST_Schaltregler; HERSTELLER: TI
N401 = FAST_Schaltregler; SPICEPREFIX: X
N404 = FAST_Schaltregler
R1-R3 = resistor; HERSTELLER: EXB-U2H103JV
R312 R313 = resistor; HERSTELLER: SEMITEC
S301 S401 = FAST_Schalter; HERSTELLER: Schurter; LEISTUNG: 120mW; SPANNUNG: max 30VAC 42VDC; VALUE: 1301.93xx
TP1 TP4 TP5 TP201 TP204-TP206 TP301-TP304 = testpad
U101 = atmel-xmega
U301-U304 = FAST_BAT; HERSTELLER: KEYSTONE
U$1 = FAST_LOGO
U$2 U$3 U$5-U$8 = FAST_MARKS
V1 V2 V301-V304 V401 = fast-transistor1
X7 = FAST_Stecker
X302 = FAST_Stecker; HERSTELLER: Würth

## Nets
1A: R3.12 U101.37
1B: R3.10 U101.38
1C: R3.8 U101.39
1D: R3.6 U101.40
1E: R3.4 U101.41
1F: R3.2 U101.42
1G: R2.16 U101.43
2A: R2.12 U101.47
2B: R2.10 U101.48
2C: R2.8 U101.49
2D: R2.6 U101.50
2E: R2.4 U101.51
2F: R2.2 U101.54
2G: R1.16 U101.55
!INT1!_PC2: N101.4 U101.18
!INT2!_PC3: N101.9 U101.19
!SS!_PE0: N101.12 U101.30
+4.1V [V+]: C305.1 D302.2 N301.10 R305.2 R314.2 R315.2 R317.2 TP302.TP V301.2 V303.2
+4V5 [VCC]: C50.2+ C307.2 C413.1 D1.2 D2.2 H401.A L7.1 N302.1 N302.12 N404.1 N404.3 TP303.TP
+5V: C15.2 C17.2 C19.2 C21.2 C23.2 C37.2+ C43.1 C44.1 C202.2 C203.1 C210.2 C216.2 IC1.4 IC2.4 IC3.4 IC4.4 IC201.4 L6.2 L201.2 N1.8 N2.8 N5.5 N6.7 N7.7
-5V: C16.1 C18.1 C20.1 C22.1 C24.1 C38.1- C45.2 C46.2 C204.1 C209.1 C211.1 C217.1 IC1.7 IC2.7 IC3.7 IC4.7 IC201.7 L9.2 L203.2 N1.4 N2.4 N6.4 N7.4
ADAP_IN: C55.2 C59.2 D7.1 JP3.1 M1.22
ADC3 [VCC]: C228.1 L209.2 U101.1
ADC7: R320.1 R322.2 TP304.TP U101.5
AGND [AGND]: C1.2 C10.2 C13.1 C15.1 C16.2 C17.1 C18.2 C19.1 C20.2 C21.1 C22.2 C23.1 C24.2 C26.2 C28.1 C30.2 C31.1 C33.1 C35.2 C36.1 C37.1- C38.2+ C39.2 C43.2 C44.2 C45.1 C46.1 C48.2 C49.1 C51.1- C201.2 C202.1 C203.2 C204.2 C205.2 C206.2 C208.2 C209.2 C210.1 C211.2 C212.2 C214.2 C215.2 C216.1 C217.2 C220.1 C224.2 C403.2 C404.2 C406.2 D403.C H1.1 H1.2 H1.3 H1.4 H1.5 H1.6 H1.7 H1.8 H1.9 H1.10 H1.11 H1.12 H1.13 H1.14 H1.15 H1.16 IC1.3 IC2.3 IC3.3 IC4.3 IC201.3 L5.1 L204.2 N5.2 N7.3 N401.5 N401.11 R6.1 R7.2 R8.2 R9.2 R10.2 R14.1 R16.1 R17.1 R30.1 R31.1 R203.2 R212.1 R408.1 TP5.TP V1.2
AIL: C66.1 M1.12
AIR: C65.1 M1.11
B0: R1.10 U101.62
B1: R1.8 U101.63
B2: R1.6 U101.64
B3: R1.4 U101.2
B4: R1.2 U101.3
CLK_PC1: N101.13 U101.17
COM: R2.14 U101.46
DM: D5.1 JP3.2 M1.36
DP: D6.1 JP3.3 M1.37
GND [GND]: C2.2 C3.2 C3.4 C3.6 C3.8 C4.2 C4.4 C4.6 C4.8 C5.2 C5.4 C5.6 C5.8 C6.1 C6.3 C6.5 C6.7 C7.1 C7.3 C7.5 C7.7 C8.1 C8.3 C8.5 C8.7 C9.2 C25.2 C29.2 C50.1- C52.1- C53.1- C54.1 C55.1 C56.1 C57.1 C59.1 C60.1 C61.1 C63.2 C64.1 C68.2 C69.1 C101.2 C102.2 C103.2 C104.2 C105.2 C106.2 C107.2 C108.2 C218.2 C228.2 C301.2 C302.2 C303.1 C304.2 C305.2 C307.1 C413.2 C418.2 C419.2 D5.2 D6.2 D7.2 D8.2 JP3.4 M1.16 M1.50 M1.56 M1.57 N101.6 N101.7 N301.3 N301.7 N301.11 N301.P$1 N301.P$2 N301.P$3 N301.P$4 N301.P$5 N302.3 N302.8 N302.9 N302.10 N302.11 N302.13 N404.2 R21.1 R23.1 R24.2 R31.2 R45.1 R46.2 R301.1 R303.1 R309.1 R311.1 R312.P$1 R313.P$1 R319.1 R322.1 S301.P1 S301.P2 S401.P1 S401.P2 U101.14 U101.24 U101.34 U101.44 U101.52 U101.60 U101.TH U302.P$1 U302.P$2 U304.P$1 U304.P$2 V2.2 V302.2 V304.2 V401.2 X7.1 X102.4 X302.A1 X302.A12 X302.B1 X302.B12 X302.G3 X302.G4 X302.Z1 X302.Z2 X302.Z3 X302.Z4 X302.Z5 X302.Z6
MICBIAS: C57.2 M1.15
N$1: H401.K R403.2
N$2: C51.2+ C403.1 L7.2 L403.1 L404.1 N401.8 R402.2
N$3: C10.1 IC3.6 IC4.6 L2.1
N$4: R401.1 V401.3
N$6: D302.3 R307.1
N$7: D302.1 R308.1
N$10: N301.8 R308.2
N$13: C1.1 L1.1 TP1.TP
N$14: IC1.2 IC2.2 R9.1
N$15: D1.1 D2.1 R401.2
N$16: C208.1 IC201.8 L202.2 R203.1
N$17: IC1.8 IC3.1
N$19: C205.1 L202.1 TP204.TP
N$20: C214.1 IC201.6 L205.1
N$21: N5.4 R209.2 R210.2
N$22: C26.1 IC1.6 IC2.6 L3.1
N$23: C201.1 L201.1 TP201.TP
N$24: C221.2 N5.1 R210.1
N$25: C4.1 H201.P$7 R1.7
N$26: C220.2 R209.1
N$27: C215.1 N5.3 R208.1
N$28 [V+]: R314.1 U301.P$1 U301.P$2
N$29: C304.1 N302.5 N302.7 R311.2 R316.1 V301.3
N$30: C32.1 R26.2 R27.1
N$31: C36.2 C49.2 C407.2 L9.1 L405.2 R406.1
N$32: D301.3 S301.P3 S301.P4
N$33: C31.2 N2.3 R26.1
N$35: C418.1 N404.4
N$36: C33.2 N2.5 R28.1
N$37: C63.1 C65.2 C67.2 C68.1 L11.2 R45.2
N$38: U101.56 X102.2
N$39: R101.1 U101.57 X102.3
N$40: R318.1 V304.3
N$44: R317.1 R318.2 V303.1
N$45: R319.2 R321.2 V304.1
N$46 [V+]: C301.1 C302.1 N301.1 TP301.TP X302.A4 X302.A9 X302.B4 X302.B9
N$47: N301.2 R302.2
N$48: R320.2 V303.3
N$49: N301.4 R303.2
N$50: C221.1 C224.1 L209.1 R212.2
N$51: N301.9 R312.P$2 R313.P$2
N$52: IC2.8 IC4.1
N$53: C27.1 R4.2 R11.1
N$54: N101.1
N$55: N301.5 R307.2
N$56: N302.6 R316.2
N$59: C13.2 N1.3 R4.1
N$61: C212.1 L204.1 TP206.TP
N$62: C35.1 C48.1 C409.1 D404.C L6.1 R407.2
N$63: R21.2 R22.1 V401.1
N$64: R305.1 R306.2 V301.1
N$65: L301.1 N302.4
N$66: D301.2 R306.1 V302.3
N$67: R309.2 R310.2 V302.1
N$68: R23.2 R25.2 V2.1
N$69: C32.2 N2.1 R28.2 R29.1
N$70: N1.2 R13.2 R14.2
N$71: L301.2 N302.2
N$72: C206.1 L203.1 TP205.TP
N$73: R315.1 U303.P$1 U303.P$2
N$74: R301.2 R302.1
N$85: C6.2 H201.P$22 R3.9
N$86: C6.4 H201.P$23 R3.11
N$87: C6.6 H201.P$11 R3.13
N$88: C6.8 H201.P$10 R3.15
N$89: C7.2 H201.P$24 R3.1
N$90: C7.4 H201.P$2 R3.3
N$91: C7.6 H201.P$3 R3.5
N$92: C7.8 H201.P$4 R3.7
N$93: C8.2 H201.P$20 R2.1
N$94: C8.4 H201.P$14 R2.3
N$95: C8.6 H201.P$15 R2.5
N$96: C8.8 H201.P$16 R2.7
N$97: C27.2 N1.1 R12.2 R13.1
N$98: C28.2 IC4.2 R12.1
N$99: IC3.2 R11.2
N$100: C11.2 IC3.8
N$101: C11.1 C12.1 R5.1
N$102: C12.2 N1.5 R6.2
N$103: C14.1 N1.7 R5.2 R15.1
N$104: C14.2 IC4.8 R8.1
N$105: C30.1 L4.1 V1.1
N$106: C404.1 N401.7 N401.9 R402.1
N$107: IC201.1 R27.2
N$108: C405.2 L404.2 N401.6
N$109: R403.1 V2.3
N$110: C405.1 D403.A L405.1
N$111: C34.2 L403.2 N401.10
N$112: C34.1 D404.A L5.2
N$113: N2.2 R29.2 R30.2
N$114: N1.6 R15.2 R16.2
N$115: C39.1 D3.A D4.K N6.3 R17.2
N$116: C64.2 C66.2 C67.1 C69.2 L10.2 R46.1
N$117: C40.2 C41.1 D3.K D4.A N6.2 R18.2
N$118: C41.2 N6.6 R18.1 R19.2
N$119: C42.1 C47.2 N7.2 R20.2
N$120: C42.2 IC201.2 N7.6 R7.1 R20.1
N$123: C3.1 H201.P$17 R1.15
N$124: C47.1 R19.1
N$125: C40.1 TP4.TP
N$126: C3.3 H201.P$13 R1.13
N$127: C3.5 H201.P$12 R1.11
N$128: C5.1 H201.P$21 R2.15
N$130: C4.3 H201.P$8 R1.5
N$131: C4.5 H201.P$6 R1.3
N$132: C4.7 H201.P$5 R1.1
N$133: C3.7 H201.P$9 R1.9
N$134: C5.3 H201.P$1 R2.13
N$135: C5.5 H201.P$19 R2.11
N$136: C5.7 H201.P$18 R2.9
N$182: C409.2 N401.1 R407.1 R408.2
N$183: C407.1 N401.4 R405.1 R406.2
N$185: C406.1 N401.2 N401.3 R405.2
NF1: IC1.1 N2.6 N2.7 R208.2
NF2: D8.1 IC2.1 L10.1 L11.1 R10.1 V1.3
P2_6: M1.21 U101.6
P3_2: M1.20 U101.9
P3_4_UART_RTS: M1.31 U101.21 X7.2
P3_7_UART_CTS: M1.48 U101.20
P8_5_UART_TXD: M1.30 U101.22
P8_6_UART_RXD: M1.29 U101.23
PA4: R321.1 U101.32
PA6: C218.1 L205.2 U101.11
PB1: C9.1 L2.2 U101.7
PD0: C29.1 L4.2 U101.26
PD1: R22.2 U101.27
PD2: C303.2 D301.1 R304.1 U101.28
PD3: R310.1 U101.29
PD5: R25.1 U101.31
PD7: C25.1 L3.2 U101.12
PE [PE]: R24.1
PWR: M1.26 U101.4
RST_N: M1.43 U101.13
SDA_PC0: N101.14 U101.16
SENSOR: C2.1 L1.2 U101.10
SYS_PWR: C56.2 M1.24
T1: R3.16 U101.33
T2: R3.14 U101.36
T3: R1.14 U101.58
T4: R1.12 U101.59
TAST2: R404.1 S401.P3 S401.P4 U101.8
VCC [VCC]: C52.2+ C101.1 C102.1 C103.1 C104.1 C105.1 C106.1 C107.1 C108.1 C419.1 L8.1 N101.5 N101.8 N404.5 R101.2 R304.2 R404.2 U101.15 U101.25 U101.35 U101.45 U101.53 U101.61 X102.1
VDD: C53.2+ C54.2 C61.2 L8.2 M1.23
VDD_IO: C60.2 M1.25

## Tracks (layer width: path | path; a pad name or v marks a point on that pad's centre or on a via)
1A
  Top 0.203: U101.37 79.07,27.59 79.27,27.79 R3.12
1B
  Top 0.203: U101.38 78.57,27.72 78.77,27.92 R3.10
1C
  Top 0.203: U101.39 78.07,27.86 78.27,28.06 R3.8
1D
  Top 0.203: U101.40 77.57,27.99 77.77,28.19 R3.6
1E
  Top 0.203: U101.41 77.07,28.25 77.27,28.45 R3.4
1F
  Top 0.203: U101.42 76.57,28.39 76.77,28.59 R3.2
1G
  Top 0.203: U101.43 76.07,30.01 75.77,30.31 73.44,30.31 R2.16
2A
  Top 0.203: U101.47 74.07,28.82 73.58,29.31 R2.12
2B
  Top 0.203: R2.10 73.19,28.81 73.57,28.43 U101.48
2C
  Top 0.203: U101.49 72.99,27.84 72.53,28.31 R2.8
2D
  Top 0.203: U101.50 72.68,25.82 72.27,26.23 72.27,26.93 71.39,27.81 R2.6
2E
  Top 0.203: U101.51 72.49,25.32 71.91,25.89 71.91,26.78 71.39,27.31 R2.4
2F
  Top 0.203: U101.54 72.1,23.82 72.08,23.83 71.22,23.83 70.17,24.88 70.17,25.67 70.64,26.15 70.64,26.8 R2.2
2G
  Top 0.203: R1.16 69.37,20.01 69.37,21.7 71.15,23.48 71.94,23.48 72.1,23.32 U101.55
!INT1!_PC2  (via drill 0.3 layers 1-2)
  Top 0.203: v88.3,15.23 88.28,15.24 N101.4 | v84.74,18.91 84.39,18.91 83.98,19.32 U101.18
  L2_VCC 0.203: v88.3,15.23 88.3,17.51 86.87,18.94 86.5,18.94 86.28,18.71 85.49,18.71 85.3,18.91 v84.74,18.91
!INT2!_PC3
  Top 0.203: N101.9 87.78,19.67 87.64,19.82 86.59,19.82 86.13,20.27 85.63,20.27 85.18,19.82 U101.19
!SS!_PE0  (via drill 0.3 layers 1-2)
  Top 0.203: N101.12 86.18,18.14 85.88,18.43 v85.88,19.67 | v85.88,25.89 84.49,25.89 83.91,25.32 83.89,25.32 83.81,25.4 83.38,25.4 83.3,25.32 U101.30
  L2_VCC 0.203: v85.88,19.67 v85.88,25.89
+4.1V  (via drill 0.3, 0.3 layers 1-2)
  Top 0.305: V301.2 133.38,13.54 R305.2 132.49,14.76 v132.49,14.84
  L2_VCC 0.305: v132.49,14.84 132.49,21.45 | 132.49,21.45 132.49,23.99 131.41,25.07 130.86,25.07 130.52,25.4 130.52,25.57 v129.69,26.4 128.68,27.41 v128.68,30.72 | v134.48,21.4 132.54,21.4 132.49,21.45
  Bottom 0.305: C305.1 129.57,25.26 TP302.TP v129.69,26.4 129.69,26.87 N301.10 | R317.2 128.85,32.54 V303.2 v128.68,30.72 | D302.2 134.68,21.2 v134.48,21.4
  Bottom 1.016: C305.1 127.47,24.72 127.47,24.43 127.08,24.05 125.95,24.05 125.11,23.21 121.04,23.21 120.55,22.72 97.75,22.72 97.25,23.22 96.3,23.22 94.39,25.13 94.39,26.91 89.56,31.74 89.56,32.79 88.97,33.38 88.13,33.38 87.63,32.88 75.09,32.88 72.93,35.04 64.87,35.04 R314.2 61.18,33.07 59.59,31.48 59.59,24.18 R315.2
+4V5  (via drill 0.3, 0.3 layers 1-2)
  Top 0.203: H401.A 2.32,5.07 3.03,4.35 D2.2 17.81,4.35 18.62,3.54 24.03,3.54 24.84,4.35 D1.2 28.65,4.35 28.86,4.56 v28.86,5.19 | N404.3 96.32,31.16 C413.1 | v21.49,36.18 21.49,34.96 L7.1 C50.2+
  Top 0.305: N404.1 93.18,29.26 93.12,29.32 v93.12,30.08 93.12,30.97 93.31,31.16 N404.3
  L2_VCC 0.305: v122.97,9.06 122.64,9.06 122.3,8.72 120.21,8.72 118.88,7.39 118.88,5.88 117.62,4.62 117.14,4.62 116.81,4.96 116.81,5.47 116.37,5.91 116.37,6.48 115.4,7.46 114.09,7.46 111.48,10.07 102.52,10.07 94.39,18.2 94.39,23.37 93.9,23.86 93.9,29.31 v93.12,30.08 89.19,34.02 89.19,35.16 87.79,36.56 63.78,36.56 62.77,37.58 55.4,37.58 v54.9,37.07
  L3_GND 0.305: v54.9,37.07 53.23,35.41 50.13,35.41 49.63,34.91 30.26,34.91 28.61,36.56 21.88,36.56 v21.49,36.18 29.12,28.55 29.12,18.65 28.48,18.01 28.48,14.72 29.24,13.96 29.24,5.57 v28.86,5.19
  Bottom 0.203: N302.1 128,9.46 | 126.82,7.9 C307.2 126.78,6.46 126.98,6.26 N302.12
  Bottom 0.305: 128,9.46 127.79,9.26 127.79,8.88 126.82,7.9 | v122.97,9.06 124.06,9.06 TP303.TP 125.21,7.9 C307.2
+5V  (via drill 0.3, 0.3 layers 15-16)
  Top 0.203: C203.1 49.52,34.02 L201.2 50.45,33.17 v50.45,31.45 | 22.32,8.55 v22.38,8.49
  Top 0.305: C37.2+ 21.7,12.05 L6.2 20.86,10.71 C44.1 22.32,8.55 | v47.78,1.11 47.91,0.99 49.67,0.99 50,1.32 N5.5
  L2_VCC 0.203: v50.45,31.45
  L2_VCC 0.305: v28.35,19.42 28.35,19.92 27.14,21.13 | 27.14,21.13 25.3,22.97 v22.89,22.97 22.38,22.46 v22.38,8.49 | 27.14,21.13 27.71,21.69 27.71,27.28 v32.15,31.73 32.15,29.71 34.07,27.8 38.13,27.8 40.29,29.96 40.29,30.46 | v50.45,31.45 46.1,31.45 45.12,30.46 40.29,30.46 | v70.39,4.56 70.39,2.91 v69.5,2.02 61.35,2.02 60.95,1.62 59.61,1.62 58.08,3.15 54.55,3.15 53.78,3.92 48.55,3.92 48.48,3.86 | v46.77,8.49 46.77,5.57 48.48,3.86 | v47.78,1.11 47.78,3.16 48.48,3.86 | 40.29,30.46 v39.91,30.85
  L5_AGND 0.305: v32.42,18.49 32.42,15.23 34.49,15.23 v36.86,12.85 37.45,13.45 38.36,13.45 38.56,13.65 39.4,13.65 39.85,14.1 39.85,14.57 39.8,14.62 39.8,15.37 40.92,16.5 42.7,16.5 v46.01,13.19 46.01,12.43 45.37,11.8 45.37,9.88 v46.77,8.49
  Bottom 0.203: 69.54,2.02 v69.5,2.02 | IC1.4 36.26,13.49 36.86,12.88 v36.86,12.85 | N2.8 33.91,29.1 33.18,29.83 C210.2 32.21,31.73 v32.15,31.73 | IC201.4 40.7,30.05 v39.91,30.85 C216.2 | IC2.4 69.16,5.49 69.21,5.43 70.29,5.43 C17.2 70.39,5.53 | N1.8 v46.77,8.49
  Bottom 0.305: C43.1 v32.42,18.49 32.2,18.49 31.4,19.29 N7.7 28.48,19.29 v28.35,19.42 | IC4.4 69.2,2.31 v69.5,2.02 | C19.2 69.54,2.02 | C202.2 22.22,23.65 v22.89,22.97 23.4,22.46 23.4,19.54 23.14,19.29 N6.7 | IC3.4 46.09,14.12 46.39,13.83 | C23.2 46.73,13.49 46.39,13.83 | C21.2 37.24,12.85 v36.86,12.85 | C15.2 47.7,1.2 v47.78,1.11 | v70.39,4.56 70.39,5.53 | 46.39,13.83 46.01,13.45 v46.01,13.19
-5V  (via drill 0.3, 0.3 layers 15-16)
  Top 0.203: L9.2 28.23,25.05 | 28.23,25.05 29.35,25.05 C46.2 | C38.1- 28.61,24.11 28.23,24.5 28.23,25.05 | 26.55,22.74 v26.45,22.84 | C209.1 36.77,34.15 L203.2 36.95,34.06 v38.13,32.88
  Top 0.305: C38.1- 26.55,22.74
  L2_VCC 0.305: v16.16,24.37 16.54,24.75 17.3,24.75 18.95,23.1 19.72,23.1 | v26.45,22.84 24.54,24.75 24.03,24.75 | 24.03,24.75 23.4,24.75 21.75,23.1 19.72,23.1 | v44.61,31.73 43.47,32.88 v38.13,32.88 37.5,33.51 28.48,33.51 24.03,29.07 24.03,24.75 | 61.88,3.92 v54.77,3.92 54.53,3.92 54.05,4.4 48.82,4.4 47.29,5.93 47.29,8.2 47.34,8.25 47.34,8.72 47,9.06 46.53,9.06 46.48,9.01 43.22,9.01 40.23,6.02 37.39,6.02 37.34,5.97 34.81,5.97 33.81,6.97 27.46,6.97 26.57,6.08 21.75,6.08 19.72,8.11 19.72,23.1 | 61.88,3.92 61.87,3.93 v61.87,5.76 | 61.88,3.92 64.24,3.92 v64.55,3.61
  L5_AGND 0.305: v41.43,22.34 33.05,22.34 31.27,20.56 31.27,17.51 | 31.27,17.51 v31.27,14.59 31.27,14.08 32.42,12.94 32.67,12.94 32.92,12.69 35.4,12.69 36.01,12.08 37.33,12.08 38.08,12.83 38.38,12.83 38.75,13.19 39.58,13.19 40.3,13.91 40.3,14.35 v41.43,15.48 | v26.45,22.84 26.7,22.59 26.7,18.27 27.46,17.51 31.27,17.51
  Bottom 0.203: C204.1 25.39,23.65 | N7.4 | 45.59,32.46 C217.1 | C20.1 63.17,6.79 62.9,6.79 | C16.1 53.4,3.34 | N1.4 54.01,4.68 | C24.1 41.14,15.19 v41.43,15.48 41.49,15.42
  Bottom 0.305: N6.4 16.76,23.11 C45.2 16.58,24.37 v16.16,24.37 | C204.1 24.5,22.84 N7.4 | v26.45,22.84 26.19,22.84 25.39,23.65 | IC201.7 43.03,33.71 43.21,33.89 45.24,33.89 45.62,33.51 C217.1 | v44.61,31.73 44.86,31.73 45.59,32.46 | C211.1 v41.43,22.34 39.66,22.34 39.31,22.68 N2.4 | IC4.7 v64.55,3.61 64.31,3.61 C22.1 | 53.4,3.34 N1.4 | 54.01,4.68 v54.77,3.92 | IC1.7 31.47,14.79 v31.27,14.59 30.85,14.59 C18.1 | v61.87,5.76 62.9,6.79 | C20.1 65.6,6.84 IC2.7 | IC3.7 41.49,15.42
ADAP_IN  (via drill 0.3, 0.3 layers 1-2)
  Top 0.203: JP3.1 D7.1 119.22,4.24 119.03,4.05 115.6,4.05 v115.35,4.3 | M1.22 105.75,6.53 v105.06,7.22
  L2_VCC 0.203: v115.35,4.3 114.97,4.68 112.3,4.68 111.17,5.81 111.17,7.31 110.62,7.86 105.69,7.86 v105.06,7.22
  Bottom 0.203: C59.2 104.04,5.95 | 104.04,5.95 104.04,6.97 104.3,7.22 v105.06,7.22 | C55.2 102.56,5.95 104.04,5.95
ADC3  (via drill 0.3, 0.3 layers 1-2)
  Top 0.203: U101.1 73.57,17.61 73.38,17.42 v73.38,17.26 | L209.2 62.77,5.19 63.75,5.19 C228.1 65.35,5.23 70.39,10.27 70.77,10.27 v71.53,11.03
  L2_VCC 0.203: v73.38,17.26 73.38,12.62 71.79,11.03 v71.53,11.03
ADC7  (via drill 0.3)
  Top 0.203: U101.5 75.57,17.22 v75.78,17
  L2_VCC 0.203: v75.78,17 75.32,17 75.29,17.03 74.86,17.03 74.55,16.72 74.55,15.42 75.85,14.12 76.47,14.12 77.82,12.77 79.2,12.77 80.68,11.29 83.97,11.29 84.75,12.06 85.1,12.06 85.81,12.77 89.17,12.77 90.37,13.97 92.7,13.97 93.14,13.54 93.14,13.04 100.09,6.08 110.27,6.08 112.17,4.18 114.74,4.18 115.13,3.78 115.56,3.78 115.7,3.92 116.27,3.92 116.68,3.51 118.08,3.51 120.04,5.47 120.04,5.7 120.05,5.7 122.2,5.7 127.67,11.16 127.67,20.96 125.87,22.76 125.87,26.29 123.35,28.81 123.35,29.07 125.38,31.1 125.38,32.24 124.62,33.01 v120.3,33.01
  Bottom 0.203: R320.1 R322.2 TP304.TP v120.3,33.01
AGND  (via drill 0.3, 0.3 layers 15-16)
  Top 0.203: C46.1 29.5,28.05 29.75,28.31 C36.1 29.75,31.99 v29.88,32.12 31.8,32.12 31.94,32.25 32.37,32.25 32.5,32.12 33.43,32.12 33.73,32.41 C209.2 C206.2 | C49.1 20.81,17.04 C406.2 v20.48,17.89 | C203.2 C201.2 46.42,37.03 v46.39,37.07 | C1.2 51.05,33.68 v50.96,33.77 | C212.2 L204.2 41.81,34.06 | 41.81,34.06 C208.2 | 41.81,34.06 41.81,32.54 R203.2 41.85,31.7 v42.32,31.23 | C205.2 41.85,34.1 41.81,34.06 | N401.11 18.96,21.19 v18.58,20.81 17.17,20.81 16.8,20.43 L5.1 | N401.5 21.35,20.57 20.73,21.19 N401.11 | N401.11 21.75,21.19 22.27,20.67 D403.C 25.83,20.67 v25.94,20.56 | R408.1 19.46,15.23 19.59,15.1 19.59,14.34 19.91,14.01 v20.48,14.01 | C35.2 17.94,8.75 v17.68,8.49 | C44.2 19.14,6.66 17.68,8.11 v17.68,8.49 | C48.2 15.53,8.88 15.91,8.49 v17.68,8.49 | C404.2 17.94,31.14 v17.94,32.24 18.32,32.24 18.7,31.86 C403.2 | C51.1- 12.6,34.4 v12.73,34.27 | v30.51,16.37 30.49,16.34 C38.2+ 28.61,14.72 29.11,14.21 29.5,14.21 29.75,13.96 29.75,12.07 C37.1- 27.72,12.05 v27.59,11.92 | C220.1 43.53,4.36 43.08,4.81 v43.08,5.45 | N5.2 49.05,6.29 49.02,6.32 49.02,7.7 v49.69,8.37 | C215.2 43.5,6.93 v43.08,7.35 | v58.95,6.84 58.86,6.93 C224.2 R212.1 | R31.1 v73.94,7.99
  L5_AGND 0.203: v18.58,20.81 20.48,18.91 v20.48,17.89 v20.48,14.01 25.71,8.78 29.34,8.78 34.07,4.05 43.08,4.05 | 43.08,4.05 v43.08,5.45 v43.08,7.35 43.08,8.88 40.97,11 40.97,11.88 v40.54,12.3 | 43.08,4.05 43.08,2.4 44.35,1.13 v45.5,1.13 46.01,1.64 v49.31,1.64 49.43,1.76 v51.85,1.76 v57.94,1.76 60.1,1.76 v60.74,2.4 66.4,2.4 66.51,2.51 67.18,2.51 67.75,3.09 69.37,3.09 v69.43,3.03 v69.43,4.18 v69.43,5.95 | v46.89,30.85 46.89,36.56 v46.39,37.07 | v39.27,14.34 38,15.61 38,16.5 36.86,17.64 v34.7,17.64 | v49.69,8.37 48.67,8.37 46.77,10.27 46.77,11.29 47.33,11.85 | v50.83,11.41 47.76,11.41 47.33,11.85 | v46.51,14.97 46.51,14.07 46.99,13.59 46.99,12.18 47.33,11.85 | v60.36,6.97 59.07,6.97 v58.95,6.84
  Bottom 0.203: C45.1 16.45,25.35 16.35,25.45 R17.1 C39.2 12.86,26.53 12.35,27.04 11.12,27.04 | 11.12,27.04 H1.3 H1.4 | 11.12,27.04 11.12,29.2 | 11.12,29.2 H1.2 | TP5.TP 11.12,27.04 | 11.12,29.2 11.08,29.23 11.08,30.34 12.18,30.34 H1.1 15.02,30.43 | 15.02,30.43 17.56,30.43 | 17.56,30.43 H1.16 H1.15 H1.14 31.56,30.43 31.65,30.34 31.65,29.31 H1.13 | H1.12 31.62,26.53 | 31.62,26.53 H1.13 | 26.45,25.35 R7.2 28.61,26.4 28.73,26.53 31.62,26.53 | 26.45,25.35 C204.2 C202.1 | 27.59,9.93 H1.8 20.48,9.93 | 27.59,9.93 30.22,9.93 30.26,9.89 30.43,9.89 H1.9 31.49,9.93 31.53,9.89 31.62,9.98 H1.10 30.59,11.08 30.13,11.54 C18.2 | 17.68,9.93 H1.7 H1.6 11.24,9.93 11.21,9.89 11.12,9.98 H1.5 | 17.68,9.93 20.48,9.93 | N7.3 v25.94,20.56 26.32,20.56 26.45,20.69 26.45,21.99 27.05,22.6 27.05,23.09 26.45,23.7 26.45,25.35 | V1.2 77.75,5.57 77.92,5.74 C30.2 C26.2 77.84,4.39 77.37,3.92 R10.2 76.45,2.99 76.36,2.91 C19.1 72.13,4.18 | 72.13,4.18 C17.1 R9.2 72.93,7.22 73.69,7.99 v73.94,7.99 | C214.2 47.66,35.29 | 47.66,35.29 47.66,35.42 46.39,36.69 v46.39,37.07 | v50.96,33.77 50.96,34.4 50.07,35.29 47.66,35.29 | IC201.3 42.38,31.17 v42.32,31.23 | v42.32,31.23 44.1,31.23 44.57,30.76 C217.2 46.81,30.76 v46.89,30.85 47.53,31.48 49.18,31.48 49.81,30.85 49.81,26.15 | IC2.3 69.25,6.14 v69.43,5.95 | v69.43,3.03 69.36,2.96 IC4.3 | v17.68,8.49 17.68,9.93 | v20.48,14.01 20.48,9.93 | v17.94,32.24 17.56,31.86 17.56,30.43 | v12.73,34.27 15.02,31.99 15.02,30.43 | C33.1 34.41,20.09 34.7,19.8 v34.7,17.64 34.7,16.88 34.61,16.79 C43.2 32.84,16.79 32.48,16.43 H1.11 30.57,16.43 v30.51,16.37 | v29.88,32.12 31.62,32.12 | C211.2 44.35,22.38 C31.1 47.31,22.38 49.81,24.88 49.81,26.15
  Bottom 0.203: R30.1 47.02,26.02 47.15,26.15 49.81,26.15 | v42.32,31.23 41.31,31.23 41.05,31.48 41.05,33.39 40.71,33.73 C216.1 38.46,33.73 38.42,33.77 33.56,33.77 33.18,33.39 C210.1 31.74,32.46 31.62,32.33 31.62,32.12 | C22.2 R8.2 60.9,2.56 v60.74,2.4 | v57.94,1.76 57.78,1.93 C13.1 57.05,3.16 56.93,3.29 56.93,6.08 57.05,6.21 R14.1 58.7,6.21 58.95,6.45 v58.95,6.84 | v51.85,1.76 51.89,1.8 C16.2 | C15.1 49.31,3.07 v49.31,1.64 | R16.1 43.3,7.57 v43.08,7.35 | R6.1 v45.5,1.13 | C28.1 48.55,10.02 48.67,9.89 48.67,9.26 48.88,9.05 48.93,9 49.05,9 v49.69,8.37 | IC3.3 46.31,14.77 v46.51,14.97 46.73,15.19 C23.1 | IC1.3 36.79,14.14 36.99,14.34 36.99,15.1 37.08,15.19 C21.1 39.19,15.19 39.27,15.1 v39.27,14.34 39.27,13.7 39.49,13.49 C24.2 40.42,12.43 v40.54,12.3 | v27.59,11.92 27.59,9.93 | H1.13 31.62,31.41 31.55,31.48 31.55,31.97 31.62,32.04 31.62,32.12 | C10.2 v50.83,11.41 | 72.13,4.18 71.28,4.18 71.14,4.04 69.57,4.04 v69.43,4.18 | C20.2 60.48,6.84 v60.36,6.97
  pour Top: 59.72,8.37 59.72,-0.78 -1.49,-0.78 -1.49,40.62 47.78,40.62 47.78,31.23 47.27,30.72 31.15,30.72 30.77,30.34 30.77,10.4 30.89,10.27 30.89,8.88 31.4,8.37
  pour Bottom: 50.83,30.34 50.83,40.24 5.11,40.24 5.11,14.34 11.59,7.86 31.53,7.86 34.58,4.81 39.15,4.81 44.23,-0.27 79.91,-0.27 79.91,8.24 79.79,8.37 58.83,8.37 55.15,12.05 52.1,12.05 50.32,13.83 50.32,29.83
AIL
  Top 0.203: C66.1 98.2,7.67 98.2,11.16 98.84,11.8 98.84,13.32 99.47,13.95 M1.12
AIR
  Top 0.203: C65.1 98.46,12.12 98.46,13.57 99.83,14.95 M1.11
B0
  Top 0.203: R1.10 71.79,17.25 71.91,17.38 71.91,18.03 72.01,18.13 72.01,19.52 72.31,19.82 U101.62
B1
  Top 0.203: R1.8 71.79,16.75 72.36,17.33 72.36,19.16 72.52,19.32 U101.63
B2
  Top 0.203: R1.6 71.41,16.25 71.79,16.25 72.14,16.61 72.72,17.18 72.72,18.06 72.99,18.34 U101.64
B3
  Top 0.203: R1.4 72.97,15.75 74.07,16.85 U101.2
B4
  Top 0.203: R1.2 72.97,15.25 74.57,16.85 U101.3
CLK_PC1
  Top 0.203: U101.17 83.81,18.82 84.04,18.59 84.21,18.59 84.49,18.31 84.67,18.31 85.34,17.64 N101.13
COM
  Top 0.203: R2.14 73.97,29.81 74.57,29.21 U101.46
DM
  Top 0.203: M1.36 118.99,10.95 119.22,10.71 D5.1 JP3.2
DP
  Top 0.203: M1.37 118.87,11.95 D6.1 119.79,11.09 119.79,9.89 119.92,9.76 JP3.3
GND  (via drill 0.3, 0.3 layers 1-2)
  Top 0.203: U101.60 70.93,20.82 v70.72,20.61 | U101.52 71.97,24.82 v71.66,25.13 | S401.P1 v42.2,23.85 S401.P2 v52.34,23.85 v52.35,23.86 | S301.P2 S301.P1 52.3,15.55 v52.35,15.61 | v74.96,35.16 74.9,35.11 C7.1 C7.3 C7.5 C7.7 | v79.79,35.16 79.73,35.11 C6.1 C6.3 C6.5 C6.7 | v81.22,28.18 80.97,27.93 80.57,27.53 U101.34 | R23.1 10.91,8.37 V2.2 8.16,8.37 v7.91,8.62 | X302.A1 129.55,16.95 | 129.55,16.95 X302.B12 129.6,15.58 | X302.G4 129.6,17 129.55,16.95 | X302.Z5 X302.Z6 | 133,15.43 X302.Z1 129.75,15.43 129.6,15.58 | 133,15.43 X302.Z3 | C4.8 C4.6 C4.4 C4.2 64.52,15.79 v64.42,15.69 | C3.2 C3.4 C3.6 C3.8 64.52,18.22 v64.42,18.32 | C8.7 C8.5 C8.3 C8.1 64.62,24.95 v64.42,24.75 | C5.2 C5.4 C5.6 C5.8 64.52,29.77 v64.42,29.87 | C104.2 v65.18,22.84 | C102.2 71.75,33.47 v71.66,33.39 | C107.2 87.28,29.2 | 87.28,29.2 C419.2 C418.2 | N404.2 95.41,30.21 95.41,29.58 95.62,29.36 C413.2 v96.42,28.18 | X302.Z5 132.93,15.5 133,15.43 | X302.A12 129.55,22.45 X302.B1 129.6,23.89 129.7,23.99 130.73,23.99 X302.Z2 132.93,23.97 | 132.93,23.97 X302.Z5 | X302.Z4 132.93,23.97 | v133.51,5.83 133.51,7.31 R311.1 | R312.P$1 R313.P$1 | C103.2 83.05,30.85 v81.82,30.85 | V302.2 129.32,10.78 129.48,10.95 R309.1 127.67,11.67 | 127.67,11.67 v126.78,11.67 | C303.1 v124.24,10.78 124.24,11.92 123.86,12.3 JP3.4 119.79,12.3 119.47,12.62 D6.2 | 129.6,15.58 128.53,15.58 127.67,14.72 127.67,11.67 | N101.7 89.69,18.14 | 89.69,18.14 v89.69,18.15 | C106.2 88.48,22.72 v88.64,22.88 | C101.2 89.91,19.12 89.69,18.9 89.69,18.14 | N101.6 89.31,17.64 89.69,18.01 89.69,18.14 | C69.1 91.09,3.71 | 91.09,3.71 v92.11,3.71 93,3.71 | 93,3.71 94.94,3.71 96.04,4.81 v98.84,4.81 99.6,5.57 99.6,9.51 100.04,9.95 M1.16
  Top 0.203: C64.1 93,3.71 | R46.2 91.09,3.71 | v92.61,13.32 C63.2 R45.1 89.06,12.14 C68.2 84.74,12.01 | 84.74,12.01 82.92,12.01 82.2,11.29 D8.2 | M1.57 108.99,24.63 v109,24.62 | C105.2 v80.68,13.19 80.42,13.19 79.87,13.74 79.87,16.68 80.07,16.87 U101.14 | C108.2 83.18,17.09 v82.58,16.5 | R21.1 v37.75,2.65 37.75,1.89 37.62,1.76 32.16,1.76 31.65,2.27 31.65,4.81 31.78,4.94 V401.2 | 84.74,12.01 v84.74,12.94 | C2.2 55.62,33.68 v55.15,34.15 | U101.44 75.57,24.32 U101.TH 77.57,22.32 U101.24 82.94,22.32 v82.96,22.34 | 87.28,29.2 v87.28,27.93 | X7.1 v126.78,4.94 | D7.2 117.95,4.68 117.44,5.19 v117.38,5.19 | D5.2 118.58,6.65 118.39,6.46 v118.14,6.46 | M1.56 110.45,14.52 110.01,14.08 v110.01,12.92 | v119.03,25 118.98,24.95 M1.50 | C228.2 63.78,7.86 64.42,8.49 v64.42,9.26 | C50.1- v28.48,34.91 | 73.94,13.45 71.15,13.45 v70.39,14.21 | 73.94,13.45 76.74,13.45 76.99,13.19 R24.2 | R31.2 73.94,13.45
  L2_VCC 0.203: 81.82,35.16 v79.79,35.16 v74.96,35.16 72.29,35.16 | 81.82,35.16 82.45,35.16 82.96,34.66 86.9,34.66 87.28,35.04 X102.4 | 65.18,23.86 65.18,23.99 v64.42,24.75 64.42,25.99 64.65,26.22 64.65,28.58 64.42,28.81 v64.42,29.87 64.42,31.33 64.9,31.81 64.9,32.87 63.62,34.15 59.09,34.15 | 65.18,23.86 v65.18,22.84 | 72.29,35.16 71.66,34.53 v71.66,33.39 | 81.22,29.7 v81.22,28.18 v81.22,28.17 81.22,22.34 v82.96,22.34 82.58,21.96 82.58,19.92 | 81.22,29.7 81.22,30.25 v81.82,30.85 81.82,35.16 | v89.69,18.15 89.69,19.29 | 89.69,19.29 89.69,21.83 v88.64,22.88 | v92.61,13.32 92.61,4.21 v92.11,3.71 | 119.03,19.92 119.03,15.61 119.67,14.97 | 119.67,14.97 119.92,14.72 120.81,14.72 121.44,14.08 JP3.4 | v109,24.62 109,23.61 | 109,23.61 109,20.69 109.76,19.92 119.03,19.92 | v52.35,15.61 52.35,17.26 52.86,17.77 52.86,23.35 v52.35,23.86 52.35,30.85 55.15,33.64 v55.15,34.15 59.09,34.15 | v64.42,15.69 v64.42,18.32 64.42,20.57 64.65,20.79 64.65,22.31 v65.18,22.84 | v70.72,20.61 67.42,20.61 v65.18,22.84 | v71.66,25.13 70.39,23.86 65.18,23.86 | 82.58,19.92 v82.58,16.5 | 89.69,19.29 86.35,19.29 86.13,19.07 85.63,19.07 84.78,19.92 82.58,19.92 | v87.28,27.93 86.64,27.93 84.87,29.7 81.22,29.7 | v110.01,12.92 117,12.92 | 117,12.92 117.62,12.92 119.67,14.97 | 117,12.92 117,7.61 v118.14,6.46 118.14,5.95 v117.38,5.19 | 119.03,19.92 v119.03,25 | v124.49,31.73 123.86,31.1 v120.17,31.1 | 59.09,34.15 59.09,35.42 60.1,36.43 61.88,36.43 62.26,36.05 71.41,36.05 72.29,35.16 | N301.P$2 127.92,30.95 128.34,31.37 129.28,31.37 129.67,30.97 v131.6,30.97 | 109,23.61 98.84,23.61 96.42,26.02 v96.42,28.18
  L3_GND 0.203: v64.42,9.26 64.42,14.21 | 64.42,14.21 v64.42,15.69 | v70.39,14.21 64.42,14.21 | v126.78,4.94 v126.78,11.67 | v28.48,34.91 29.24,34.15 39.02,34.15 40.93,32.23 40.93,30.65 42.2,29.39 v42.2,23.85 | v37.75,2.65 36.48,3.92 36.48,5.79 36.99,6.3 37.5,6.3 43.75,12.56 49.31,12.56 v52.35,15.61
  Bottom 0.203: N302.3 129.24,8.06 N302.13 129.64,7.66 N302.9 | N302.11 N302.10 N302.9 | N302.9 N302.8 130.04,5.35 | C25.2 C29.2 84.91,5.99 85.38,6.46 85.38,10.53 85.69,10.84 | N301.7 131.21,28.55 131.6,28.94 131.6,29.45 | N301.P$1 127.41,30.21 125.89,31.73 v124.49,31.73 124.45,31.77 R322.1 | 127.41,28.31 N301.P$2 | N301.P$1 127.41,28.31 | 127.41,28.31 N301.P$3 | 127.41,27.8 N301.P$4 126.9,26.65 126.65,26.4 126.4,26.4 126.31,26.31 C305.2 | N301.P$1 127.41,27.8 | 127.41,27.8 N301.P$5 | N301.3 N301.P$1 | X302.G3 X302.B1 | X302.B12 X302.G4 | 130.04,5.35 130.08,5.32 133,5.32 v133.51,5.83 | 96.3,12.94 95.79,12.94 95.66,12.81 C53.1- 87.92,11.06 C52.1- 85.78,10.93 85.69,10.84 | 96.3,12.94 100.6,12.94 U302.P$2 v110.01,12.92 U302.P$1 | R313.P$1 96.33,12.98 96.3,12.94 | R303.1 R301.1 120.17,29.58 | v96.42,28.18 96.42,27.29 97.31,26.4 U304.P$2 | C307.1 v126.78,11.67 125.13,11.67 v124.24,10.78 | C304.2 134.27,15.48 134.32,15.43 X302.Z3 | C59.1 104.04,3.41 103.66,3.03 100.87,3.03 C57.1 99.43,4.21 v98.84,4.81 | C55.1 C59.1 | C59.1 C54.1 C61.1 C56.1 C60.1 | v82.58,16.5 82.58,13.19 | 82.58,13.19 v80.68,13.19 | v7.91,8.62 7.91,5.07 9.05,3.92 14.89,3.92 15.91,2.91 37.5,2.91 v37.75,2.65 | 82.58,13.19 82.83,12.94 v84.74,12.94 84.74,11.8 85.69,10.84 | v52.35,15.61 53.62,15.61 53.79,15.44 C9.2 | v55.15,34.15 55.11,34.11 C218.2 | 130.04,5.35 129.63,4.94 v126.78,4.94 | 120.17,29.58 120.17,26.78 C302.2 C301.2 119.41,25.38 v119.03,25 118.52,24.5 113.95,24.5 113.7,24.75 U304.P$1 | 120.17,29.58 v120.17,31.1 | V304.2 v131.6,30.97 131.6,29.45 | R319.1 131.68,29.37 131.6,29.45
  pour Bottom: 53.5,39.86 53.5,13.96 53.75,13.7 58.58,13.7 59.98,12.3 81.69,12.3 83.85,10.14 83.85,0.62 138.08,0.62 138.08,39.86
  pour Top: 53.5,39.86 53.5,13.96 53.75,13.7 58.58,13.7 59.98,12.3 80.04,12.3 83.85,8.49 83.85,0.62 138.08,0.62 138.08,39.86
  pour L3_GND: 53.5,39.86 53.5,13.96 53.75,13.7 58.58,13.7 59.98,12.3 81.69,12.3 83.85,10.14 83.85,0.62 138.08,0.62 138.08,39.86
  pour L2_VCC: 53.5,39.86 53.5,13.96 53.75,13.7 58.58,13.7 59.98,12.3 81.69,12.3 83.85,10.14 83.85,0.62 138.08,0.62 138.08,39.86
MICBIAS  (via drill 0.3)